# Altium PCB SL6996.PcbDoc
Units mm, origin at the board's own origin, x right, y up, seen from the top; angles counter-clockwise.
Board outline 23.86 x 25 mm, 4 copper layers (Top Layer, Layer 2, Layer 3, Bottom Layer), stack 1.602 mm thick; 10 components, 14 nets, 65 pads, 150 vias.
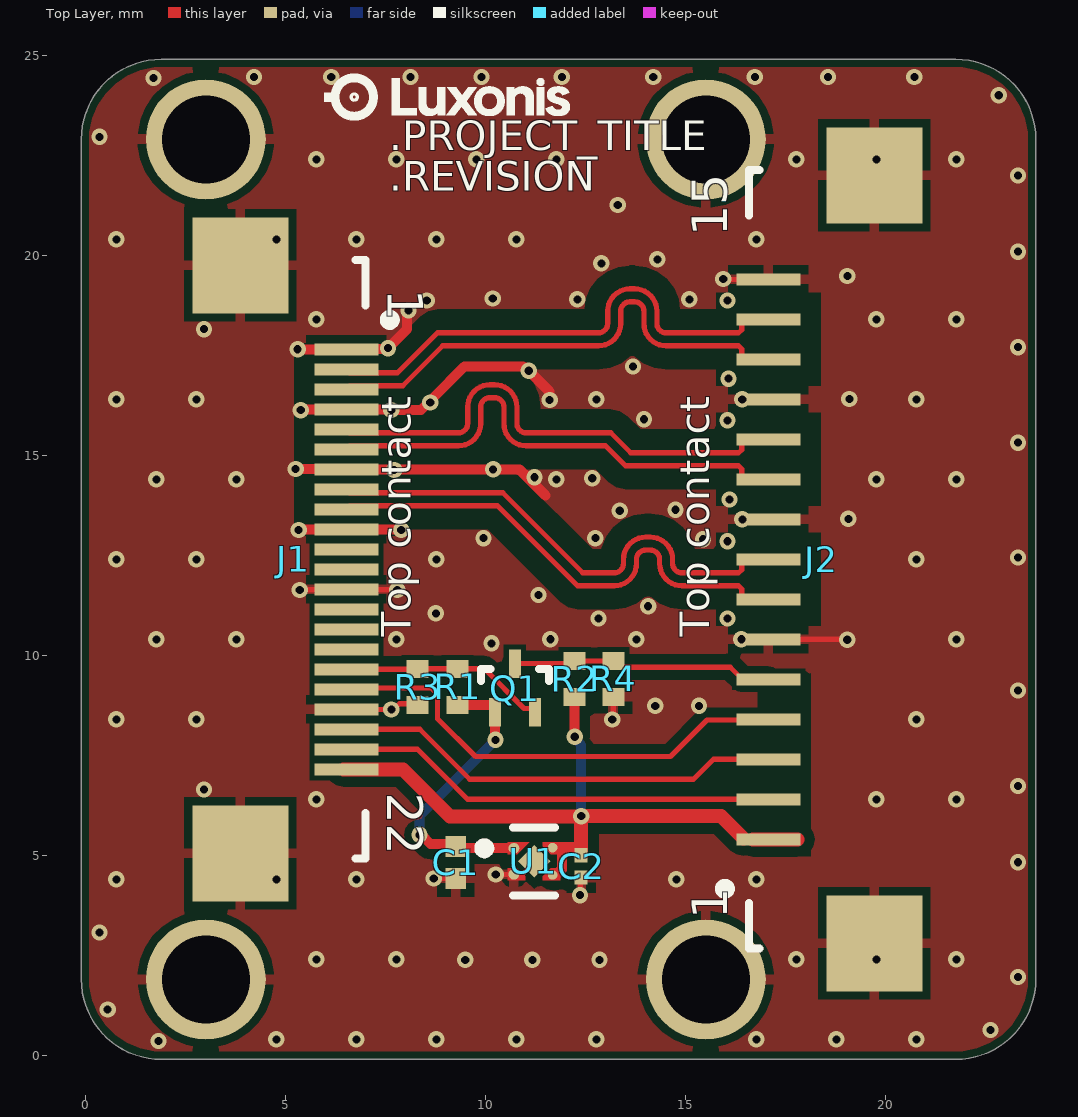
[diagram p0: Top Layer view]
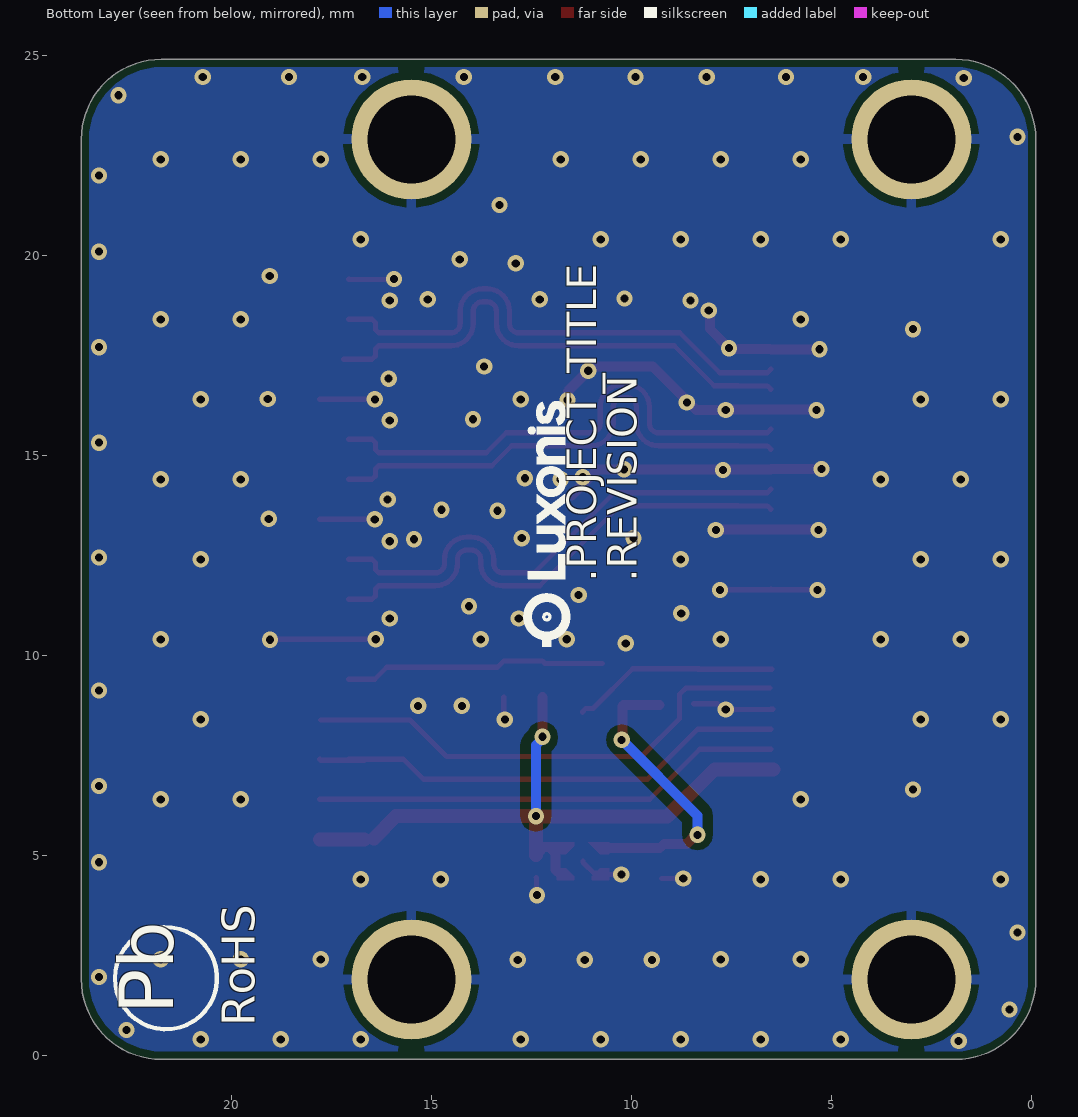
[diagram p1: Bottom Layer view, seen from below]
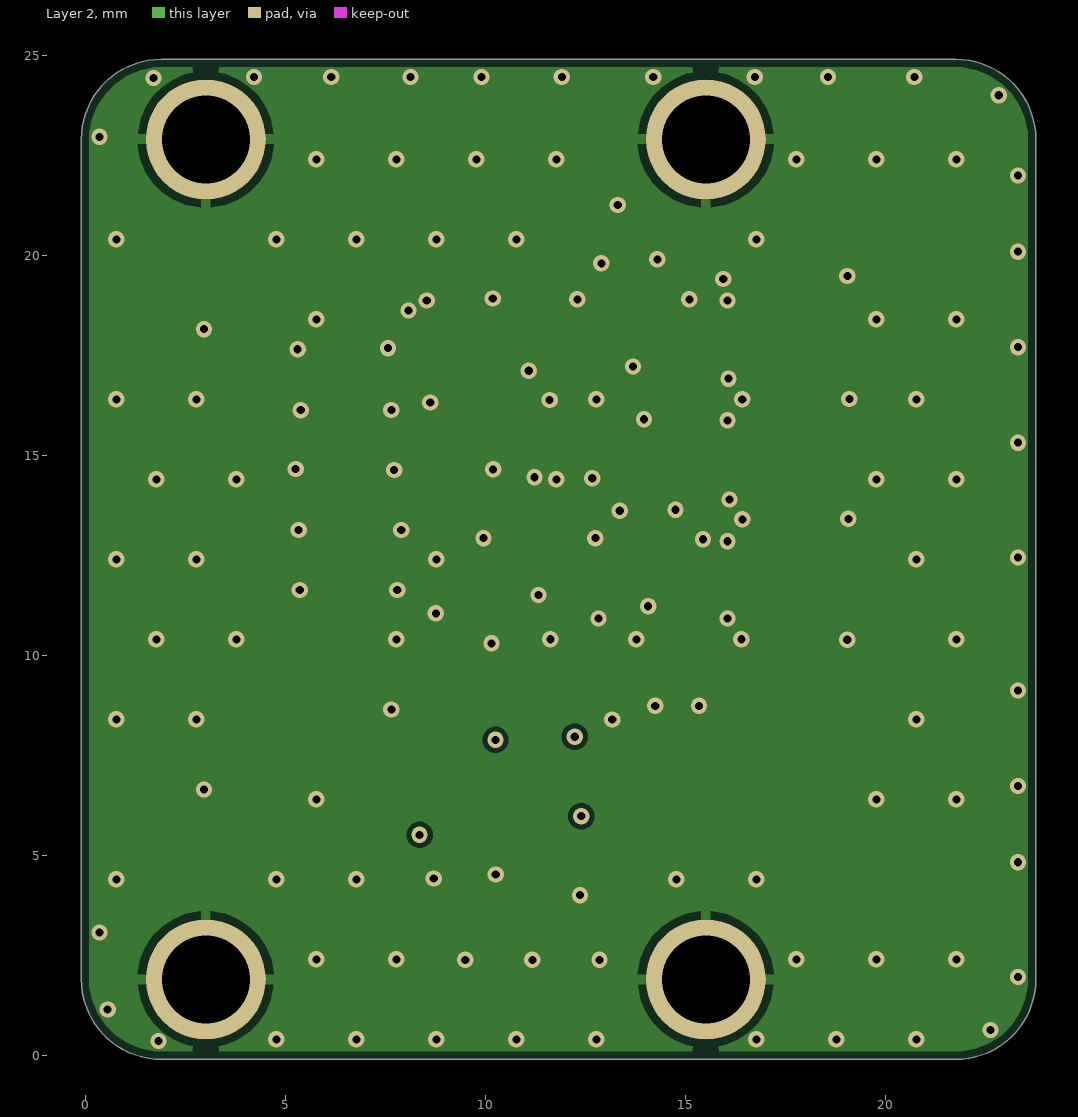
[diagram p2: Layer 2]
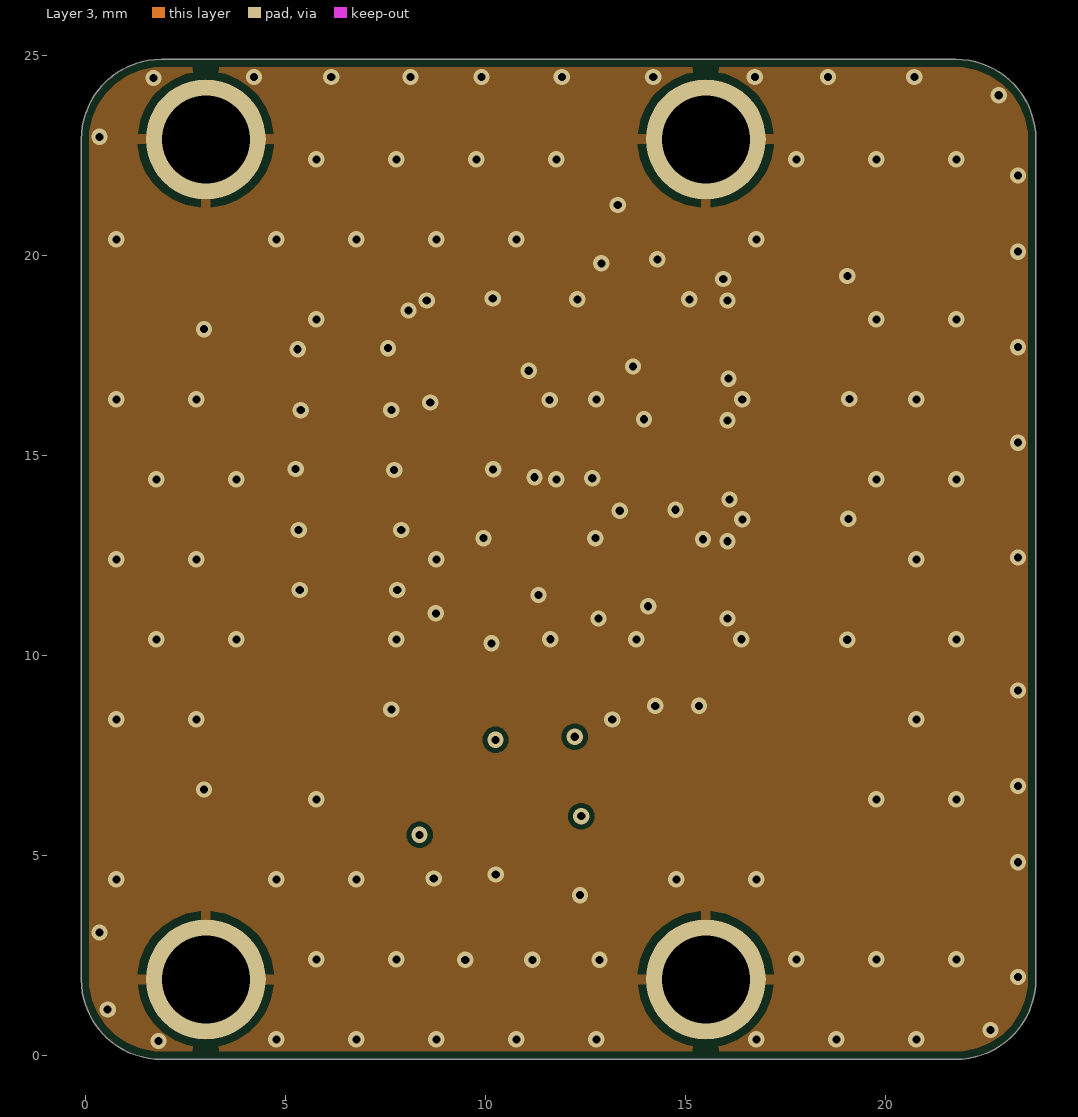
[diagram p3: Layer 3]

## Layer stack, top to bottom
Top Mask: solder mask 0.018, SM-001, Dk 4.2
Top Layer: signal copper 0.0356
Dielectric 1: prepreg 0.18, PP-021, Dk 4.2
Layer 2: signal copper 0.0356
Core: core 1.1, Core-042, Dk 4.2
Layer 3: signal copper 0.0356
Dielectric 2: prepreg 0.18, PP-021, Dk 4.2
Bottom Layer: signal copper 0.0356
Bottom Mask: solder mask 0.018, SM-001, Dk 4.2

## Board outline
-0.1,1.9 ccw(c1.9,1.9) 1.9,-0.1 21.762,-0.1 ccw(c21.762,1.9) 23.762,1.9 23.762,22.9 ccw(c21.762,22.9) 21.762,24.9 1.9,24.9 ccw(c1.9,22.9) -0.1,22.9

## Design rules (kind name [scope] priority, off if disabled: settings)
AssemblyTestPointUsage [All] p1: valid=2
BoardOutlineClearance [All] p1: gap=0.2 ignorepadtopadclearanceinfootprint=FALSE
Clearance Clearance_BGA [WithinRoom('BGA') or WithinRoom('U14') or WithinRoom('J8')or WithinRoom('J14') or WithinRoom('U_PCIE_Switch_CTRL') or  WithinRoom('U_PCIE_SSD') or WithinRoom('J10') or WithinRoom('U15') or WithinRoom('U19')] p1: gap=0.076 ignorepadtopadclearanceinfootprint=TRUE except(0.254: Arc-Fill Arc-Poly Arc-Region Track-Fill Track-Poly Track-Region)
Clearance Clearance_Diff_to_GND [(InDifferentialPairClass('All Differential Pairs')) vs InNet('GND')] p2: gap=0.1 ignorepadtopadclearanceinfootprint=TRUE except(0.25: Track-Track; 0.254: THPad-Poly Via-Poly; 0.508: Arc-Poly Track-Poly SMDPad-Poly Fill-Poly Poly-Poly)
Clearance Clearance_PoE_to_non-PoE [InNetClass('PoE') vs not InNetClass('PoE')] p3: gap=0.3 ignorepadtopadclearanceinfootprint=TRUE except(0.15: Arc-SMDPad Track-SMDPad; 0.5: THPad-Poly; 1: Poly-Poly)
Clearance Clearance_PoE_to_PoE [InNetClass('PoE') vs InNetClass('PoE')] p4: gap=0.3 ignorepadtopadclearanceinfootprint=TRUE except(0.2: Arc-THPad Track-THPad)
Clearance Clearance_Diff_to_Diff_intra [(InDifferentialPairClass('All Differential Pairs'))] p5: gap=0.1 ignorepadtopadclearanceinfootprint=TRUE except(0.075: Arc-Track Track-Track; 0.254: THPad-Poly Via-Poly; 0.508: Arc-Poly Track-Poly SMDPad-Poly Fill-Poly Poly-Poly)
Clearance Clearance_Diff_to_Diff [(InDifferentialPairClass('All Differential Pairs'))] p6: gap=0.1 ignorepadtopadclearanceinfootprint=TRUE except(0.254: THPad-Poly Via-Poly; 0.3: Track-Track; 0.508: Arc-Poly Track-Poly SMDPad-Poly Fill-Poly Poly-Poly)
Clearance Clearance_Diff_to_All [(InDifferentialPairClass('All Differential Pairs')) vs not (InDifferentialPairClass('All Differential Pairs'))] p7: gap=0.3 ignorepadtopadclearanceinfootprint=TRUE except(0.254: THPad-Poly Via-Poly; 0.508: Arc-Poly Track-Poly SMDPad-Poly Fill-Poly Poly-Poly)
Clearance [All] p8: gap=0.12 ignorepadtopadclearanceinfootprint=TRUE except(0.254: Arc-Fill Arc-Poly Arc-Region Track-Fill Track-Poly Track-Region)
ComponentClearance [All] p1: gap=0 collisioncheckmode=3 verticalgap=0 showdistances=FALSE
DiffPairsRouting 90ohm [InDifferentialPairClass('90ohm')] p1: maxlimit=0.195 minlimit=0.101 mostfreqgap=0.15 toplayer_mingap=0.102 toplayer_maxgap=0.102 toplayer_prefgap=0.102 toplayer_minwidth=0.121 toplayer_maxwidth=0.121 toplayer_prefwidth=0.121 midlayer2_minwidth=0.381 midlayer2_maxwidth=0.381 midlayer2_prefwidth=0.381 midlayer3_mingap=0.15 midlayer3_maxgap=0.15 midlayer3_minwidth=0.131 midlayer3_maxwidth=0.131 midlayer3_prefwidth=0.131 bottomlayer_mingap=0.102 bottomlayer_maxgap=0.102 bottomlayer_prefgap=0.102 bottomlayer_minwidth=0.153 bottomlayer_maxwidth=0.153 bottomlayer_prefwidth=0.153 impedanceprofiledriven=TRUE maxuncoupledlength=12.7
DiffPairsRouting 100ohm [InDifferentialPairClass('100ohm')] p2: maxlimit=0.269 minlimit=0.108 mostfreqgap=0.269 toplayer_mingap=0.195 toplayer_maxgap=0.195 toplayer_prefgap=0.195 toplayer_minwidth=0.13 toplayer_maxwidth=0.13 toplayer_prefwidth=0.13 midlayer2_minwidth=0.381 midlayer2_maxwidth=0.381 midlayer2_prefwidth=0.381 midlayer3_mingap=0.269 midlayer3_minwidth=0.13 midlayer3_maxwidth=0.13 midlayer3_prefwidth=0.13 bottomlayer_mingap=0.193 bottomlayer_maxgap=0.193 bottomlayer_prefgap=0.193 bottomlayer_minwidth=0.13 bottomlayer_maxwidth=0.13 bottomlayer_prefwidth=0.13 impedanceprofiledriven=TRUE maxuncoupledlength=12.7
FabricationTestPointUsage [All] p1: valid=2 allowmultiple=FALSE
FanoutControl [All] p1: bgadir=Out bgaviamode=Centered fanoutstyle=Rows fanoutdirection=OutOnly viagrid=0.025
FanoutControl Fanout_BGA [IsBGA] p2: bgadir=Out bgaviamode=Centered fanoutstyle=Auto fanoutdirection=Alternating viagrid=0.025 // Fanout_BGA (Default Rule)
FanoutControl Fanout_LCC [IsLCC] p3: bgadir=Out bgaviamode=Centered fanoutstyle=Auto fanoutdirection=Alternating viagrid=0.025 // Fanout_LCC (Default Rule)
FanoutControl Fanout_SOIC [IsSOIC] p4: bgadir=Out bgaviamode=Centered fanoutstyle=Auto fanoutdirection=Alternating viagrid=0.025 // Fanout_SOIC (Default Rule)
FanoutControl Fanout_Small [(CompPinCount < 5)] p5: bgadir=Out bgaviamode=Centered fanoutstyle=Auto fanoutdirection=OutThenIn viagrid=0.025 // Fanout_Small (Default Rule)
FanoutControl Fanout_Default [All] p6: bgadir=Out bgaviamode=Centered fanoutstyle=Auto fanoutdirection=Alternating viagrid=0.025 // Fanout_Default (Default Rule)
HoleSize uVia [IsMicroVia] p1: absolutevalues=TRUE maxlimit=0.3 minlimit=0.1 maxpercent=80.000 minpercent=20.000
HoleSize [All] p2: absolutevalues=TRUE maxlimit=25.4 minlimit=0.2 maxpercent=80.000 minpercent=20.000
HoleToHoleClearance [All] p1: gap=0.127 allowstackedmicrovias=FALSE
MatchedLengths "Schematic Matched Net Lengths_1" [InNetClass('MIPI')] p1: tolerance=0.127 checknetsindiffpair=FALSE checkdiffpairvsdiffpair=TRUE checkxsignals=TRUE checkothers=TRUE usedelayunits=TRUE delaytolerance=1.000000
MatchedLengths "Schematic Matched Net Lengths" [InNetClass('MIPI')] p2: tolerance=25.4 checknetsindiffpair=TRUE checkdiffpairvsdiffpair=FALSE checkxsignals=FALSE checkothers=FALSE usedelayunits=TRUE delaytolerance=0.500000
MatchedLengths MatchedLengths_100R [InDifferentialPairClass('100ohm')] p3: tolerance=25.4 checknetsindiffpair=TRUE checkdiffpairvsdiffpair=FALSE checkxsignals=FALSE checkothers=FALSE usedelayunits=TRUE delaytolerance=0.500000
MatchedLengths MatchedLengths_90R [InDifferentialPairClass('90ohm')] p4: tolerance=25.4 checknetsindiffpair=TRUE checkdiffpairvsdiffpair=FALSE checkxsignals=FALSE checkothers=FALSE usedelayunits=TRUE delaytolerance=0.500000
MatchedLengths MatchedLengths_inter_MIPI_RX5 [InNetClass('MIPI_RX5')] p5: tolerance=25.4 checknetsindiffpair=FALSE checkdiffpairvsdiffpair=TRUE checkxsignals=TRUE checkothers=TRUE usedelayunits=TRUE delaytolerance=0.500000
MatchedLengths MatchedLengths_inter_MIPI_RX4 [InNetClass('MIPI_RX4')] p6: tolerance=25.4 checknetsindiffpair=FALSE checkdiffpairvsdiffpair=TRUE checkxsignals=TRUE checkothers=TRUE usedelayunits=TRUE delaytolerance=0.500000
MatchedLengths MatchedLengths_inter_MIPI_RX0/1 [InNetClass('MIPI_RX0/1')] p7: tolerance=25.4 checknetsindiffpair=FALSE checkdiffpairvsdiffpair=TRUE checkxsignals=TRUE checkothers=TRUE usedelayunits=TRUE delaytolerance=0.500000
MatchedLengths MatchedLengths_inter_MIPI_RX2/3 [InNetClass('MIPI_RX2/3')] p8: tolerance=25.4 checknetsindiffpair=FALSE checkdiffpairvsdiffpair=TRUE checkxsignals=TRUE checkothers=TRUE usedelayunits=TRUE delaytolerance=0.500000
MatchedLengths MatchedLengths_intra_MIPI_RX0/1 [InNetClass('MIPI_RX0/1')] p9: tolerance=25.4 checknetsindiffpair=TRUE checkdiffpairvsdiffpair=FALSE checkxsignals=FALSE checkothers=FALSE usedelayunits=TRUE delaytolerance=0.500000
MatchedLengths MatchedLengths_intra_MIPI_RX2/3 [InNetClass('MIPI_RX2/3')] p10: tolerance=25.4 checknetsindiffpair=TRUE checkdiffpairvsdiffpair=FALSE checkxsignals=FALSE checkothers=FALSE usedelayunits=TRUE delaytolerance=0.500000
MatchedLengths MatchedLengths_intra_MIPI_RX4 [InNetClass('MIPI_RX4')] p11: tolerance=25.4 checknetsindiffpair=TRUE checkdiffpairvsdiffpair=FALSE checkxsignals=FALSE checkothers=FALSE usedelayunits=TRUE delaytolerance=0.500000
MatchedLengths MatchedLengths_intra_MIPI_RX5 [InNetClass('MIPI_RX5')] p12: tolerance=25.4 checknetsindiffpair=TRUE checkdiffpairvsdiffpair=FALSE checkxsignals=FALSE checkothers=FALSE usedelayunits=TRUE delaytolerance=0.500000
MinimumSolderMaskSliver MinimumSolderMaskSliver_1 [All] p1: minsoldermaskwidth=0.051
MinimumSolderMaskSliver MinimumSolderMaskSliver_mic [HasFootprint('ICS-43434')] p2: minsoldermaskwidth=0.049
MinimumSolderMaskSliver [All vs not ( HasFootprint('DF40HC-3.0-100DS-0.4V_minpad')  or HasFootprint('CP2102N-A02-GQFN28R')  or HasFootprint('10118192-0001LF')  or HasFootprint('TPD4EUSB30DQAR')  or HasFootprint('105450-0101') )] p3: minsoldermaskwidth=0.076
PlaneClearance [All] p1: clearance=0.254
PlaneConnect [All] p1: pad.planeconnectstyle=Relief pad.reliefexpansion=0.508 pad.reliefentries=4 pad.reliefconductorwidth=0.254 pad.reliefairgap=0.254 via.planeconnectstyle=Direct via.reliefexpansion=0.508 via.reliefentries=4 via.reliefconductorwidth=0.254 via.reliefairgap=0.254
PolygonConnect PolygonConnect_Holes [(HasFootprint('MOUNTING_HOLE_M2.5') OR HasFootprint('Mount_Hole_4.3mm'))] p1: connectstyle=Direct reliefconductorwidth=0.254 reliefentries=4 polygonreliefangle="90 Angle" airgapwidth=0.254
PolygonConnect PolygonConnect_Direct [InNetClass('POWER')  or InNetClass('PoE')] p2: connectstyle=Direct reliefconductorwidth=0.254 reliefentries=4 polygonreliefangle="90 Angle" airgapwidth=0.254
PolygonConnect [All] p3: thpad.connectstyle=Relief thpad.reliefconductorwidth=0.25 thpad.reliefentries=4 thpad.polygonreliefangle="90 Angle" thpad.airgapwidth=0.2 smdpad.connectstyle=Relief smdpad.reliefconductorwidth=0.25 smdpad.reliefentries=4 smdpad.polygonreliefangle="90 Angle" smdpad.airgapwidth=0.2 via.connectstyle=Direct via.reliefconductorwidth=0.254 via.reliefentries=4 via.polygonreliefangle="90 Angle" via.airgapwidth=0.254
RoutingVias RoutingVias_DiffPairs [InDifferentialPairClass('All Differential Pairs')] p1: holewidth=0.203 width=0.406 viastyle="Through Hole" minholewidth=0.203 minwidth=0.406 maxholewidth=0.203 maxwidth=0.406
RoutingVias RoutingVias_General [All] p2: holewidth=0.254 width=0.508 viastyle="Through Hole" minholewidth=0.203 minwidth=0.406 maxholewidth=0.406 maxwidth=0.762
SilkToSilkClearance [All] p1: silktosilkclearance=0.025
SilkToSolderMaskClearance [InPadClass('All Pads')] p1: minsilkscreentomaskgap=0 clearancetoexposedcopper=FALSE
SolderMaskExpansion SolderMaskExpansion_Via [isvia] p1: expansion=-10 istentingtop=TRUE
SolderMaskExpansion [All] p2: expansion=0.05 istentingtop=FALSE
UnRoutedNet [All] p1: checkbadconnections=TRUE
Width Width_BGA [WithinRoom('BGA')] p1: maxlimit=2.54 minlimit=0.102 preferedwidth=0.102
Width Width_POE [InNetClass('PoE_Power')] p2: maxlimit=2 minlimit=0.2 preferedwidth=0.5
Width Width_Power [InNetClass('POWER')] p3: maxlimit=2.032 minlimit=0.203 preferedwidth=0.508
Width [All] p4: maxlimit=2.032 minlimit=0.102 preferedwidth=0.254
13 further rules are at their usual default settings.

## Classes and differential pairs
differential pair class 100ohm: MIPI_C MIPI_D0 MIPI_D1
net class Power_trace: 1V8 3V3
net class MIPI: MIPI_C_N MIPI_C_P MIPI_D0_N MIPI_D0_P MIPI_D1_N MIPI_D1_P
polygon class GND: GND_L01_P027 GND_L02_P021 GND_L04_P016 GND_L05_P001 GND_L06_P025
differential pair MIPI_D1: +MIPI_D1_P -MIPI_D1_N
differential pair MIPI_D0: +MIPI_D0_P -MIPI_D0_N
differential pair MIPI_C: +MIPI_C_P -MIPI_C_N

## Components (designator, comment, footprint, x,y, rotation, side; value= is the part's Value field where it differs from the comment)
C1 "GRM155R60J106ME15D" CAPC0402(1005)70_L 9.261,4.822 r90 top value=10µF
C2 "GRM033R61A105ME15D" CAPC0201(0603)33_L 12.395,4.725 r90 top value=1µF
J1 "F32Q-1A7H1-11022" F32Q-1A7H1-11022 5.3,12.4 r270 top locked
J2 "F52Q-1A7H1-11015" F52Q-1A7H1-11015-Footprint-1 18.3,12.4 r90 top locked
Q1 "RE1C002UNTCL" RE1C002UNTCL 10.736,9.182 r0 top
R1 "RC0402FR-1310KL" RESC0402(1005)_L 9.306,9.213 r270 top value=10k
R2 "RC0402FR-1310KL" RESC0402(1005)_L 12.235,9.411 r270 top value=10k
R3 "RC0402FR-1310KL" RESC0402(1005)_L 8.306,9.213 r90 top value=10k
R4 "RC0402FR-1310KL" RESC0402(1005)_L 13.2,9.411 r90 top value=10k
U1 "NCP114AMX180TBG" FP-517CU-MFG 11.218,4.851 r270 top

## Footprints (in the part's own frame and the unit in brackets; to place one, negate y for a bottom-side part, rotate by r counter-clockwise, add the part's x,y. Pads: shape width x height; smd on the part's side, far side on the other; paste and mask are expansions set on the pad)
CAPC0201(0603)33_L [mm] "Chip Capacitor, Body 0.6x0.3mm, Height 0.33mm, IPC High Density"
  rect 0.36x0.32 smd: 1(-0.28,0) 2(0.28,0)
  body extent -0.32,-0.17 0.32,0.17, height 0.33
CAPC0402(1005)70_L [mm] "Chip Capacitor, Body 1.0x0.5mm, Height 0.7mm, IPC High Density"
  rect 0.52x0.52 smd: 1(-0.4,0) 2(0.4,0)
  body extent -0.55,-0.3 0.55,0.3, height 0.7
F32Q-1A7H1-11022 [mm] "22pin Molex FFC 0.5mm Top"
  rect 0.3x1.6 smd: 1(-5.25,1.225) 2(-4.75,1.225) 3(-4.25,1.225) 4(-3.75,1.225) 5(-3.25,1.225) 6(-2.75,1.225) 7(-2.25,1.225) 8(-1.75,1.225) 9(-1.25,1.225) 10(-0.75,1.225) 11(-0.25,1.225) 12(0.25,1.225) 13(0.75,1.225) 14(1.25,1.225) 15(1.75,1.225) 16(2.25,1.225) 17(2.75,1.225) 18(3.25,1.225) 19(3.75,1.225) 20(4.25,1.225) 21(4.75,1.225) 22(5.25,1.225)
  rect 2.4x2.4 smd: MP1(-7.35,-1.425) MP2(7.35,-1.425)
  silkscreen extent -7.49,1.45 7.49,2.44, body extent -9.17,-4.4 9.13,1.1, height 2.05
F52Q-1A7H1-11015-Footprint-1 [mm]
  rect 0.3x1.6 smd: 1(-7,1.225) 2(-6,1.225) 3(-5,1.225) 4(-4,1.225) 5(-3,1.225) 6(-2,1.225) 7(-1,1.225) 8(0,1.225) 9(1,1.225) 10(2,1.225) 11(3,1.225) 12(4,1.225) 13(5,1.225) 14(6,1.225) 15(7,1.225)
  rect 2.4x2.4 smd: MP1(-9.6,-1.425) MP2(9.6,-1.425)
  silkscreen extent -9.74,1.45 9.74,2.44, body extent -11.41,-4.41 11.39,1.09, height 2.12
FP-517CU-MFG [mm]
  round 0.27 smd paste+0 mask+0: 1(-0.325,-0.503) 2(0.325,-0.503)
  round 0.242 smd paste+0 mask+0: 3(0.34,0.465) 4(-0.34,0.465)
  rect 0.58x0.58 smd rot 135 paste+0 mask+0: 5(0,0)
  Top Layer region: -0.475,0.223 -0.475,0.653 -0.175,0.653 -0.175,0.423 -0.375,0.223
  Top Layer region: 0.475,-0.223 0.475,-0.653 0.175,-0.653 0.175,-0.423 0.375,-0.223
  Top Layer region: -0.475,-0.653 -0.475,-0.122 -0.175,-0.423 -0.175,-0.653
  Top Layer region: 0.475,0.653 0.175,0.653 0.175,0.423 0.375,0.223 0.475,0.223
  silkscreen extent -0.85,-1.37 0.85,0.53, body extent -0.63,-0.75 0.63,0.75, height 0.25
RE1C002UNTCL [mm] "ROHM SOT-416FL"
  rect 0.3x0.71 smd: 1(-0.5,-0.61) 2(0.5,-0.61) 3(0,0.61)
  silkscreen extent -0.85,0.18 0.85,0.48, body extent -0.95,-1.06 0.95,1.06, height 0.25
RESC0402(1005)_L [mm] "Chip Resistor, Body 1.0x0.5mm, IPC High Density"
  rect 0.45x0.55 smd: 1(-0.45,0) 2(0.45,0)
  body extent -0.52,-0.27 0.53,0.28, height 0.4

## Part data
C1: library part CMP-004-000009-5, "CAP CER 10UF 6.3V X5R 0402 20%", Case/Package=0402, Dielectric=X5R, Manufacturer 1=Murata, Max Operating Temperature=85°C, Min Operating Temperature=-55°C, Tolerance=20%, Voltage Rating=6.3V, ComponentLink1Description=https://www.murata.com/~/media/webrenewal/support/library/catalog/products/capacitor/mlcc/c02e.ashx?la=en-us&src-supplier=Digi-Key, ComponentLink1URL=https://www.murata.com/~/media/webrenewal/support/library/catalog/products/capacitor/mlcc/c02e.ashx?la=en-us&src-supplier=Digi-Key, Design Item ID=GRM155R60J106ME15D, Length=0.039inch, Manufacturer Part Number 1=GRM155R60J106ME15D, Mounting Technology=SMT, Width=0.02inch
C2: library part CMP-004-000026-6, "CAP CER 1UF 10V X5R 0201 20%", Capacitor Type=Ceramic, Case/Package=0201, Dielectric=X5R, Manufacturer 1=Murata, Max Operating Temperature=85°C, Min Operating Temperature=-55°C, Tolerance=20%, Voltage Rating=10V, ComponentLink1Description=https://psearch.en.murata.com:443/capacitor/product/GRM033R61A105ME15%23.pdf?src-supplier=IHS+Markit, ComponentLink1URL=https://psearch.en.murata.com:443/capacitor/product/GRM033R61A105ME15%23.pdf?src-supplier=IHS+Markit, ComponentLink2Description=http://search.murata.co.jp/Ceramy/image/img/A01X/G101/ENG/GRM033R61A105ME15-01.pdf?src-supplier=Digi-Key, ComponentLink2URL=http://search.murata.co.jp/Ceramy/image/img/A01X/G101/ENG/GRM033R61A105ME15-01.pdf?src-supplier=Digi-Key, Design Item ID=GRM033R61A105ME15D, Manufacturer Part Number 1=GRM033R61A105ME15D, Mounting Technology=SMT
J1: library part CMP-002-00195-1, "FPC/FFC Connector Socket 22 Position 0.5mm Top Contact Solder Right Angle Surface Mount T/R", Manufacturer 1="Amphenol ICC / FCI", Max Operating Temperature=105°C, Min Operating Temperature=-40°C, Voltage Rating=50V, Manufacturer Part Number 1=F32Q-1A7H1-11022, Mount="Surface Mount", Pins=22, Pitch=0.02inch, System=connector
J2: library part CMP-002-00189-2, "FPC/FFC Connector Socket 15 Position 1mm Top Contact Solder Right Angle Surface Mount T/R", Manufacturer 1=Amphenol, Manufacturer Part Number 1=F52Q-1A7H1-11015, Pins=15, System=connector
Q1: library part CMP-120-000001-2, "MOSFET N-CH 20V 0.2A EMT3", Case/Package=SOT-89, Continuous Drain Current=200mA, Manufacturer 1=Rohm, Max Drain to Source Voltage=20V, Design Item ID=RE1C002UNTCL, Manufacturer Part Number 1=RE1C002UNTCL
R1 R2 R3 R4: library part CMP-115-000004-8, "RES SMD 10K OHM 1% 1/16W 0402", Case/Package=0402, Manufacturer 1=Yageo, Max Operating Temperature=155°C, Min Operating Temperature=-55°C, Power Rating=62.5mW, Temperature Coefficient=100ppm/°C, Tolerance=1%, Voltage Rating=50V, Design Item ID=RC0402FR-1310KL, Manufacturer Part Number 1=RC0402FR-1310KL
U1: library part CMP-00047-1, "LDO Voltage Regulators 300 MA CMOS LDO AD O", Case/Package=UDFN-4, Manufacturer 1=onsemi, Max Operating Temperature=85°C, Max Output Current=300mA, Max Supply Voltage=5.5V, Min Operating Temperature=-40°C, Min Supply Voltage=1.7V, Output Voltage=1.8V, Manufacturer Part Number 1=NCP114AMX180TBG, Pins=5, Vfb/Vout=1.8V

## Free pads (board coordinates)
  round 3 hole 2.2: 1(3.011,22.9) 2(15.511,22.9) 3(3.011,1.9) 4(15.511,1.9)

## Via types
v1: diameter 0.406, hole 0.203, Top Layer to Bottom Layer, tented both sides, 150 vias

## Nets (pads, with @x,y where several pads share a name; then routed paths per layer and width w, separated by ;. In a path a pad name is that pad's centre, name@x,y a point inside that pad or via, vN(x,y) a via of type N, cw(c..) or ccw(c..) an arc to the next point about the centre after c; other vN are vias at no path point)
1V8: C1.2 Q1.1 R1.2 U1.1 | length 7.4
  Top Layer w0.25: v1(8.357,5.512) 8.399,5.512 8.626,5.285 9.198,5.285 9.303,5.18 10.712,5.18 U1.1 ; R1.2 9.886,8.763 9.889,8.76 10.211,8.76 10.236,8.735 v1@10.236,7.904
  Bottom Layer w0.25: v1(8.357,5.512) 8.357,5.99 v1(10.254,7.887)
3V3: C2.2 J1.22 J2.1 R2.2 U1.3 U1.4 | length 17.7
  Top Layer w0.25: U1.3 11.772,4.511 11.913,4.651 11.913,5.061 11.978,5.126 12.059,5.207 ; U1.4@11.699,5.207 12.059,5.207 ; 12.193,5.192 12.322,5.192 12.395,5.192 ; v1(12.235,7.963) R2.2 ; C2.2 12.322,5.078 12.193,5.207 12.059,5.207
  Top Layer w0.35: J1.22@6.452,7.15 J1.22 7.938,7.15 9.114,5.974 12.392,5.974 v1(12.397,5.979) 15.896,5.979 J2.1@16.45,5.425 ; C2.2 12.395,5.192 v1@12.395,5.974 ; J2.1@16.688,5.4 J2.1@17.8,5.4
  Bottom Layer w0.25: v1(12.235,7.963) 12.235,7.921 12.397,7.758 v1(12.397,5.979)
ENABLE: J1.17 Q1.2 R1.1 R3.2 | length 5.2
  Top Layer w0.13: J1.17@6.502,9.65 J1.17 R3.2@8.357,9.65 ; R3.2 R1.1 9.976,9.663 10.967,8.672 11.151,8.672 11.236,8.587 Q1.2
ENABLE_RPI: J2.5 Q1.3 R2.1 R4.2 | length 6.6
  Top Layer w0.13: Q1.3 12.166,9.792 R2.1 R4.2 13.36,9.701 16.124,9.701 16.425,9.4 J2.5
GND: C1.1 C2.1 J1.1 J1.4 J1.7 J1.10 J1.13 J1.19 J1.MP1 J1.MP2 J2.6 J2.9 J2.12 J2.15 J2.MP1 J2.MP2 pad.1 pad.2 pad.3 pad.4 R3.1 R4.1 U1.2 U1.5 | length 33.6
  Top Layer w0.13: v1(5.359,11.633) 5.368,11.642 6.517,11.642 J1.13 6.533,11.642 7.789,11.642 v1(7.798,11.633) ; J1.19@6.477,8.65 J1.19 6.529,8.646 v1(7.65,8.646) ; v1@7.579,8.717 7.517,8.655 7.64,8.655 v1(7.65,8.646) ; R3.1@8.458,8.788 7.854,8.788 7.711,8.646 v1(7.65,8.646) ; v1(8.712,4.42) 9.259,4.42 C1.1 ; v1(10.262,4.521) 10.71,4.521 U1.2 10.742,4.553 10.948,4.553 11.218,4.824 U1.5 ; v1(12.369,4.004) 12.382,4.017 12.382,4.432 C2.1 ; v1(13.175,8.395) 13.2,8.42 R4.1 ; v1(15.948,19.411) 15.961,19.398 17.073,19.398 J2.15 ; v1(16.4,10.403) 16.403,10.4 17.8,10.4 19.036,10.4 v1(19.047,10.389) ; v1(16.424,16.4) J2.12@17.8,16.4 ; v1(16.426,13.4) J2.9@17.8,13.4
  Top Layer w0.25: v1(5.258,14.656) 5.261,14.653 6.522,14.653 J1.7 6.535,14.64 7.712,14.64 v1(7.722,14.63) 7.731,14.64 10.186,14.64 v1(10.196,14.65) 10.85,14.65 11.5,14 ; v1@5.306,17.65 v1(5.309,17.653) v1(5.309,17.653) 6.523,17.651 J1.1 6.539,17.664 7.555,17.664 v1(7.569,17.678) 8.047,18.156 8.047,18.588 v1(8.077,18.618) ; v1(5.334,13.132) 5.343,13.141 J1.10@6.525,13.141 ; v1@5.364,16.15 v1(5.385,16.129) 5.395,16.139 6.515,16.139 J1.4 6.534,16.141 7.641,16.141 v1(7.65,16.132) 8.39,16.132 8.581,16.323 v1(8.623,16.323) 8.623,16.366 8.702,16.444 8.702,16.449 9.474,17.221 10.936,17.221 11.045,17.113 v1(11.087,17.113) ; J1.10 6.534,13.141 7.89,13.141 v1(7.899,13.132) ; v1@11,17.2 v1(11.087,17.113) ; 11.6,16.6 v1(11.087,17.113)
  other v1: 1.829,0.356 4.775,0.4 6.775,0.4 8.775,0.4 10.775,0.4 12.775,0.4 16.775,0.4 18.775,0.4 20.775,0.4 22.631,0.635 0.559,1.143 23.317,1.956 5.775,2.4 7.775,2.4 9.5,2.388 11.176,2.388 12.852,2.388 17.775,2.4 19.775,2.4 21.775,2.4 0.356,3.073 0.775,4.4 4.775,4.4 6.775,4.4 14.775,4.4 16.775,4.4 23.317,4.826 5.775,6.4 19.775,6.4 21.775,6.4 2.967,6.648 23.317,6.731 0.775,8.4 2.775,8.4 20.775,8.4 14.249,8.738 15.342,8.738 23.317,9.119 10.152,10.3 1.775,10.4 3.775,10.4 7.775,10.4 11.625,10.401 13.775,10.4 21.775,10.4 12.827,10.922 16.053,10.922 8.763,11.049 14.072,11.227 11.328,11.506 0.775,12.4 2.775,12.4 8.775,12.4 20.775,12.4 23.317,12.446 16.053,12.852 15.443,12.903 9.957,12.929 12.751,12.929 19.075,13.411 13.36,13.614 14.757,13.64 16.104,13.894 1.775,14.4 3.775,14.4 11.775,14.4 19.775,14.4 21.775,14.4 12.675,14.427 11.227,14.453 23.317,15.316 16.053,15.875 13.97,15.9 0.775,16.4 2.775,16.4 11.608,16.383 12.775,16.4 20.775,16.4 19.101,16.408 16.078,16.916 13.691,17.221 23.317,17.704 2.967,18.154 5.775,18.4 19.775,18.4 21.775,18.4 8.534,18.872 16.053,18.872 12.3,18.9 15.1,18.9 10.185,18.923 19.05,19.482 12.9,19.8 14.3,19.9 23.317,20.091 0.775,20.4 4.775,20.4 6.775,20.4 8.775,20.4 10.775,20.4 16.775,20.4 13.31,21.26 23.317,21.996 5.775,22.4 7.775,22.4 9.775,22.4 11.775,22.4 17.775,22.4 19.775,22.4 21.775,22.4 0.356,22.962 22.835,24.003 1.702,24.435 4.216,24.46 6.147,24.46 8.128,24.46 9.906,24.46 11.913,24.46 14.199,24.46 16.739,24.46 18.567,24.46 20.726,24.46
GPI: J1.18 J2.4 | length 12.7
  Top Layer w0.13: J1.18@6.551,9.182 8.649,9.182 8.806,9.025 8.806,8.415 9.754,7.468 14.63,7.468 15.545,8.382 J2.4@17.782,8.382
I2C_SCL_RPI: J1.20 J2.3 | length 12.4
  Top Layer w0.13: J1.20 8.36,8.15 9.61,6.9 15.206,6.9 15.706,7.4 16.681,7.4 J2.3 ; J2.3@16.681,7.375 17.075,7.375 17.775,7.375 J2.3@17.8,7.4
I2C_SDA_RPI: J1.21 J2.2 | length 11.8
  Top Layer w0.13: J1.21 8.301,7.65 9.551,6.4 J2.2@17.8,6.4
MIPI_C_N: J1.8 J2.8 | length 12.8
  Top Layer w0.13: J1.8 6.61,14.065 7.334,14.065 7.336,14.062 10.438,14.062 12.438,12.062 12.994,12.062 13.221,12.062 ccw(c13.221,12.294) 13.453,12.294 13.453,12.398 cw(c14.01,12.398) 14.01,12.955 14.126,12.955 cw(c14.126,12.398) 14.683,12.398 14.683,12.294 ccw(c14.915,12.294) 14.915,12.062 15.7,12.062 16.333,12.062 16.409,12.139 16.409,12.315 16.494,12.4 J2.8
MIPI_C_P: J1.9 J2.7 | length 12.8
  Top Layer w0.13: J1.9 6.61,13.735 7.334,13.735 7.336,13.738 10.303,13.738 12.303,11.738 13.221,11.738 ccw(c13.221,12.294) 13.778,12.294 13.778,12.398 cw(c14.01,12.398) 14.01,12.63 14.126,12.63 cw(c14.126,12.398) 14.358,12.398 14.358,12.294 ccw(c14.915,12.294) 14.915,11.738 15.835,11.738 16.333,11.738 16.409,11.661 16.409,11.485 16.494,11.4 J2.7
MIPI_D0_N: J1.2 J2.14 | length 13.8
  Top Layer w0.13: J1.2 6.61,17.065 7.334,17.065 7.336,17.062 7.803,17.062 8.803,18.062 12.6,18.062 12.827,18.062 ccw(c12.827,18.294) 13.059,18.294 13.059,18.605 cw(c13.616,18.605) 13.616,19.162 13.732,19.162 cw(c13.732,18.605) 14.289,18.605 14.289,18.294 ccw(c14.521,18.294) 14.521,18.062 16.3,18.062 ; 15.3,18.062 16.333,18.062 16.409,18.139 16.409,18.315 16.494,18.4 J2.14
MIPI_D0_P: J1.3 J2.13 | length 13.9
  Top Layer w0.13: J1.3 6.61,16.735 7.334,16.735 7.336,16.738 7.938,16.738 8.938,17.738 12.6,17.738 12.827,17.738 ccw(c12.827,18.294) 13.384,18.294 13.384,18.605 cw(c13.616,18.605) 13.616,18.837 13.732,18.837 cw(c13.732,18.605) 13.964,18.605 13.964,18.294 ccw(c14.521,18.294) 14.521,17.738 16.3,17.738 ; 15.3,17.738 15.435,17.738 16.333,17.738 16.409,17.661 16.409,17.485 16.494,17.4 J2.13 J2.13@17.21,17.4
MIPI_D1_N: J1.5 J2.11 | length 12.8
  Top Layer w0.13: J1.5 6.61,15.565 7.334,15.565 7.336,15.562 9.1,15.562 9.327,15.562 ccw(c9.327,15.794) 9.559,15.794 9.559,16.209 cw(c10.116,16.209) 10.116,16.766 10.232,16.766 cw(c10.232,16.209) 10.789,16.209 10.789,15.794 ccw(c11.021,15.794) 11.021,15.562 12.1,15.562 13.138,15.562 13.638,15.062 15.717,15.062 16.333,15.062 16.409,15.139 16.409,15.315 16.494,15.4 J2.11
MIPI_D1_P: J1.6 J2.10 | length 12.8
  Top Layer w0.13: J1.6 6.61,15.235 7.334,15.235 7.336,15.238 9.1,15.238 9.327,15.238 ccw(c9.327,15.794) 9.884,15.794 9.884,16.209 cw(c10.116,16.209) 10.116,16.441 10.232,16.441 cw(c10.232,16.209) 10.464,16.209 10.464,15.794 ccw(c11.021,15.794) 11.021,15.238 12.1,15.238 13.003,15.238 13.503,14.738 15.852,14.738 16.333,14.738 16.409,14.661 16.409,14.485 16.494,14.4 J2.10
pads on no net: J1.11 J1.12 J1.14 J1.15 J1.16

## Polygon pours and split planes (outlines as drawn)
GND on Layer 2 "GND_L02_P002" (solid, remove dead copper, pour order 2): 1.9,-0.1 cw(c1.9,1.9) -0.1,1.9 -0.1,22.9 cw(c1.9,22.9) 1.9,24.9 21.762,24.9 cw(c21.762,22.9) 23.762,22.9 23.762,1.9 cw(c21.762,1.9) 21.762,-0.1
GND on Layer 3 "GND_L03_P003" (solid, remove dead copper, pour order 3): 1.9,-0.1 cw(c1.9,1.9) -0.1,1.9 -0.1,22.9 cw(c1.9,22.9) 1.9,24.9 21.762,24.9 cw(c21.762,22.9) 23.762,22.9 23.762,1.9 cw(c21.762,1.9) 21.762,-0.1
GND on Bottom Layer "GND_L04_P004" (solid, remove dead copper, pour order 4): 1.9,-0.1 cw(c1.9,1.9) -0.1,1.9 -0.1,22.9 cw(c1.9,22.9) 1.9,24.9 21.762,24.9 cw(c21.762,22.9) 23.762,22.9 23.762,1.9 cw(c21.762,1.9) 21.762,-0.1
GND on Top Layer "GND_L01_P001" (solid, remove dead copper, pour order 1): 1.9,-0.1 cw(c1.9,1.9) -0.1,1.9 -0.1,22.9 cw(c1.9,22.9) 1.9,24.9 21.762,24.9 cw(c21.762,22.9) 23.762,22.9 23.762,1.9 cw(c21.762,1.9) 21.762,-0.1

## Other copper
Top Layer:
  pour cut-out: 18.136,9.554 18.136,4.98 17.499,4.98 16.8,5.679 16.8,9.1

## Silkscreen, mask and mechanical layers (free items; w line width, h text height)
Top Overlay:
  drawing of 10 lines, arcs and shapes, not listed
  text ".PROJECT_TITLE" at 7.595,22.377 h1.27
  text ".REVISION" at 7.595,21.361 h1.27
  text "Top contact" at 8.382,10.465 h1.27 r90
  text "Top contact" at 15.85,10.465 h1.27 r90
Bottom Overlay:
  drawing of 11 lines, arcs and shapes, not listed
  text ".REVISION" at 9.627,11.836 h1.27 r270
  text ".PROJECT_TITLE" at 10.643,11.836 h1.27 r270
  text "Pb" at 21.017,1.029 h2.34 r270
  text "RoHS" at 19.145,0.727 h1.4 r270
Board (Mech6):
  the board outline again, w0.05

## Text inside footprints (layer, text, board x,y; h text height)
J1: Top Overlay "22" at 7.252,6.567 h1.52 r270; Top Overlay "1" at 7.256,19.147 h1.52 r270
J2: Top Overlay "15" at 16.348,20.483 h1.52 r90; Top Overlay "1" at 16.344,3.403 h1.52 r90